# Altium PCB IRTxRx.PcbDoc
Units mil, origin at the board's own origin, x right, y up, seen from the top; angles counter-clockwise.
Board outline 600 x 600 mil, 2 copper layers (Top Layer, Bottom Layer); 15 components, 6 nets, 54 pads, 9 vias.
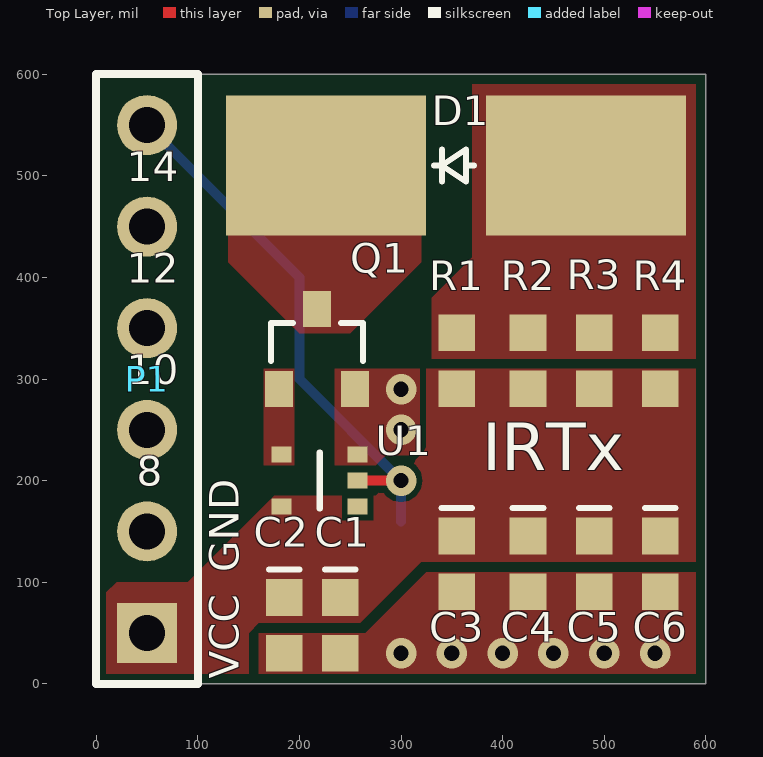
[diagram p0: Top Layer view]
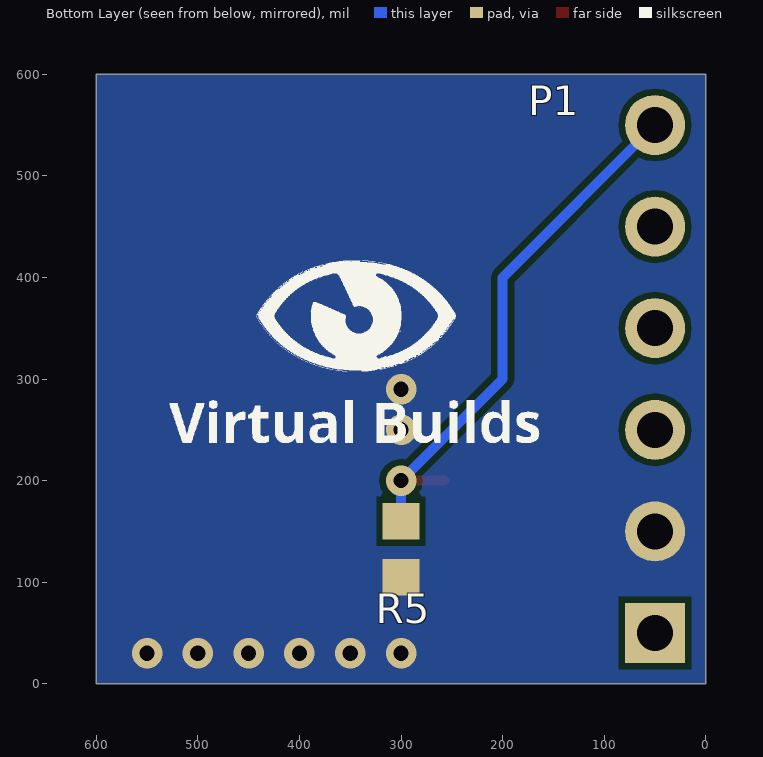
[diagram p1: Bottom Layer view, seen from below]
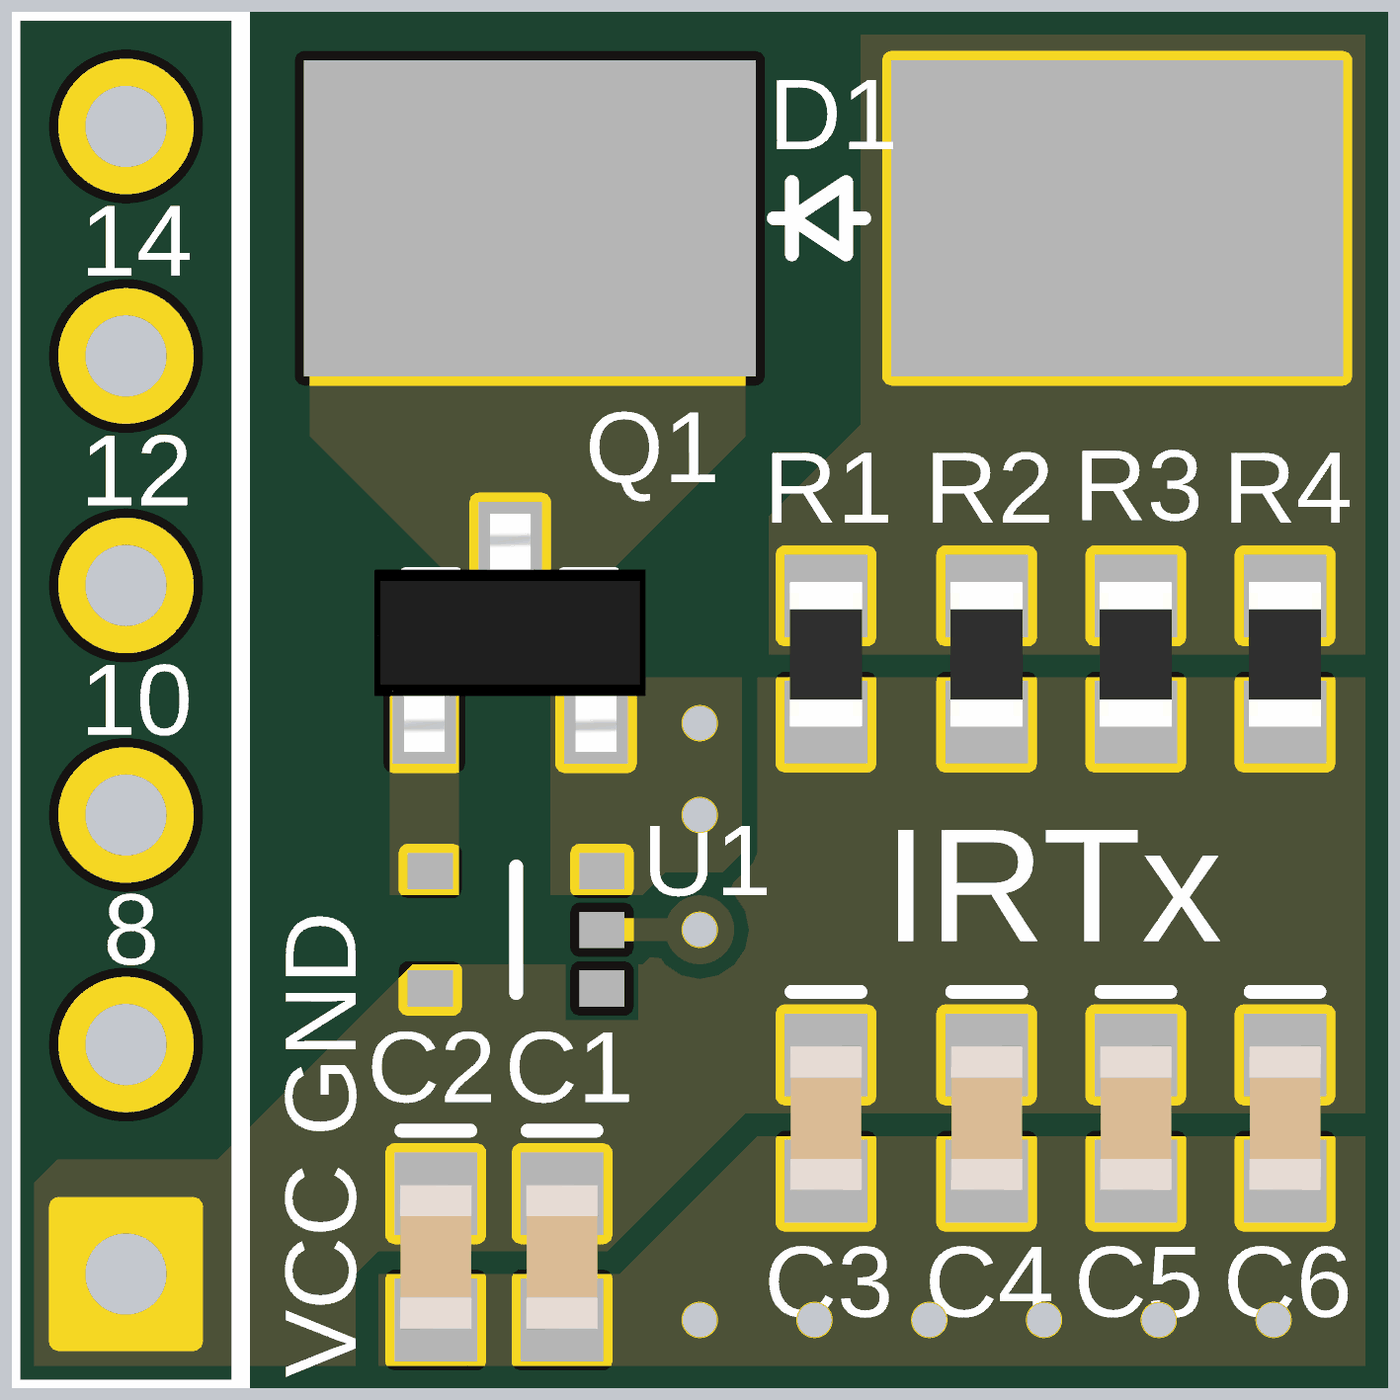
[diagram p2: 3D render of the assembled board from above, using the file's embedded part models]

## Layer stack, top to bottom
Top Layer: signal copper 1.4
Dielectric: dielectric 12.6, FR-4, Dk 4.8
Bottom Layer: signal copper 1.4

## Board outline
0,0 0,600 600,600 600,0

## Design rules (kind name [scope] priority, off if disabled: settings)
Clearance [All] p1: gap=6
PlaneConnect [All] p1: planeconnectstyle=Direct reliefexpansion=20 reliefentries=4 reliefconductorwidth=10 reliefairgap=10
PolygonConnect [All] p1: connectstyle=Direct reliefconductorwidth=10 reliefentries=4 polygonreliefangle="90 Angle" airgapwidth=10
RoutingVias [All] p1: holewidth=28 width=50 viastyle="Through Hole" minholewidth=28 minwidth=50 maxholewidth=28 maxwidth=50
SolderMaskExpansion [All] p1: expansion=4
Width [All] p1: maxlimit=100 minlimit=6 preferedwidth=6 minimp=50.000000 maximp=50.000000 favimp=50.000000
27 further rules are at their usual default settings.

## Components (designator, comment, footprint, x,y, rotation, side; value= is the part's Value field where it differs from the comment)
C1 "06035A101JAT2A" C_0603 240,85 r270 top
C2 "C1608X7R1A225K080AC" C_0603 185,85 r270 top
C3 "06035A101JAT2A" C_0603 355,145.47 r270 top
C4 "06035A101JAT2A" C_0603 425,145.47 r270 top
C5 "C1608X7R1A225K080AC" C_0603 490,145.47 r270 top
C6 "C1608X7R1A225K080AC" C_0603 555,145.47 r270 top
D1 "SFH 4255-Z" SFH4255 350,510 r180 top
P1 "Header 6" HDR1X6 50,50 r90 top
Q1 "ZXMN2A01FTA" SOT23 180,290 r0 top
R1 "RES 240 OHM 1/10W 1% 0603 SMD" R_0603 355,290.47 r90 top
R2 "RES 240 OHM 1/10W 1% 0603 SMD" R_0603 425,290.47 r90 top
R3 "RES 240 OHM 1/10W 1% 0603 SMD" R_0603 490,290.47 r90 top
R4 "RES 240 OHM 1/10W 1% 0603 SMD" R_0603 555,290.47 r90 top
R5 "RES 10K OHM 1/10W 1% 0603 SMD" R_0603 300,160 r270 bottom
U1 "74LVC1G17" SOT_353 220,200 r180 top

## Footprints (in the part's own frame and the unit in brackets; to place one, negate y for a bottom-side part, rotate by r counter-clockwise, add the part's x,y. Pads: shape width x height; smd on the part's side, far side on the other; paste and mask are expansions set on the pad)
C_0603 [mil]
  rect 36x36 smd: 1(0,0) 2(55,0)
  silkscreen extent -28,-15 -27,15, body extent -4,-16 59,16, height 31
HDR1X6 [mm] "Connector; Header; 6 Position"
  rect 1.5x1.5 hole 0.9: 1(0,0)
  round 1.5 hole 0.9: 2(2.54,0) 3(5.08,0) 4(7.62,0) 5(10.16,0) 6(12.7,0)
  silkscreen extent -1.27,-1.27 13.97,1.27
R_0603 [mil]
  rect 36x36 smd: 1(0,0) 2(55,0)
  body extent -2,-16 61,16, height 18
SFH4255 [mm]
  rect 5x3.5 smd: 1(-3.35,0) 2(3.15,0)
  silkscreen extent -0.55,-0.4 0.45,0.4
SOT23 [mm]
  rect 0.7x0.9 smd: 1(0,0) 2(1.9,0) 3(0.95,2)
  silkscreen extent -0.2,0.7 2.1,1.65, body extent -0.55,-0.32 2.45,2.32, height 1.08
SOT_353 [mm]
  rect 0.5x0.4 smd: 1(-0.95,0.65) 2(-0.95,0) 3(-0.95,-0.65) 4(0.95,-0.65) 5(0.95,0.65)
  silkscreen extent 0,-0.7 0,0.7

## Part data
C1 C3 C4: "CAP CER 100PF 50V C0G/NP0 0603"
C2 C5 C6: library part "CAP CER 2.2UF 10V 10% X7R 0603", "Vishay VJ Series"
D1: "EMITTER IR 860NM 100MA SMD"
P1: "Header, 6-Pin"
Q1: "MOSFET N-CH 20V 1.9A SOT23-3"
R1 R2 R3 R4 R5: "Panasonic ERJ-3EK"
U1: "IC BUF NON-INVERT 5.5V 5TSSOP"

## Free pads (board coordinates)
  round 0 hole 19.68 unplated: MB(-10,255) MB(-10,285) MB(-10,315) MB(-10,345) MB(255,-10) MB(255,610) MB(285,-10) MB(285,610) MB(315,-10) MB(315,610) MB(345,-10) MB(345,610) MB(610,255) MB(610,285) MB(610,315) MB(610,345)

## Via types
v1: diameter 30, hole 15, Top Layer to Bottom Layer, tented both sides, 9 vias

## Nets (pads, with @x,y where several pads share a name; then routed paths per layer and width w, separated by ;. In a path a pad name is that pad's centre, name@x,y a point inside that pad or via, vN(x,y) a via of type N, cw(c..) or ccw(c..) an arc to the next point about the centre after c; other vN are vias at no path point)
GND: C1.2 C2.2 C3.2 C4.2 C5.2 C6.2 P1.2 Q1.2 R5.2 U1.3
  other v1: 300,30 350,30 400,30 450,30 500,30 550,30 300,250 300,290
INPUT: P1.6 R5.1 U1.2 | length 536.2
  Top Layer w10: U1.2 v1(300,200)
  Bottom Layer w10: P1.6 200,400 200,300 v1(300,200) R5.1
NetD1_1: D1.1 R1.2 R2.2 R3.2 R4.2
NetD1_2: D1.2 Q1.3
NetQ1_1: Q1.1 U1.4
VCC: C1.1 C2.1 C3.1 C4.1 C5.1 C6.1 P1.1 R1.1 R2.1 R3.1 R4.1 U1.5
pads on no net: P1.3 P1.4 P1.5 U1.1

## Polygon pours and split planes (outlines as drawn)
VCC on Top Layer "Mid-Layer 1-No Net" (solid, pour order 5): 10,10 10,90 20,100 90,100 175,185 275,185 325,235 325,310 590,310 590,120 320,120 260,60 160,60 150,50 150,10
GND on Top Layer "Mid-Layer 1-No Net" (solid, pour order 15): 160,10 160,50 265,50 325,110 590,110 590,10
NetQ1_1 on Top Layer "Mid-Layer 1-No Net" (solid, pour order 11): 170,215 195,215 195,310 165,310 165,215
NetD1_2 on Top Layer "Mid-Layer 1-No Net" (solid, pour order 9): 130,450 130,430 130,415 200,345 230,345 250,345 320,415 320,450
GND on Top Layer "Mid-Layer 1-No Net" (solid, pour order 7): 235,215 235,310 320,310 320,235 310,225 285,225 275,215
NetD1_1 on Top Layer "Mid-Layer 1-No Net" (solid): 330,320 590,320 590,590 370,590 370,420 330,380
GND on Bottom Layer "Mid-Layer 1-No Net" (solid, pour order 13): 0,0 0,600 600,600 600,0

## Silkscreen, mask and mechanical layers (free items; w line width, h text height)
Top Overlay:
  text "14" at 30,485 h50
  text "12" at 30,385 h50
  text "10" at 30,285 h50
  text "IRTx" at 380,195 h80
  text "8" at 40,185 h50
  text "GND" at 150,110 h50 r90
  text "VCC" at 150,5 h50 r90
Bottom Overlay:
  drawing of 19 lines, arcs and shapes, not listed

## Dimensions
0,0 to 600,0 on Mechanical 3
0,0 to 0,600 on Mechanical 3